# EAGLE board I2C-DS Brd v33 (EAGLE 9.7.0)
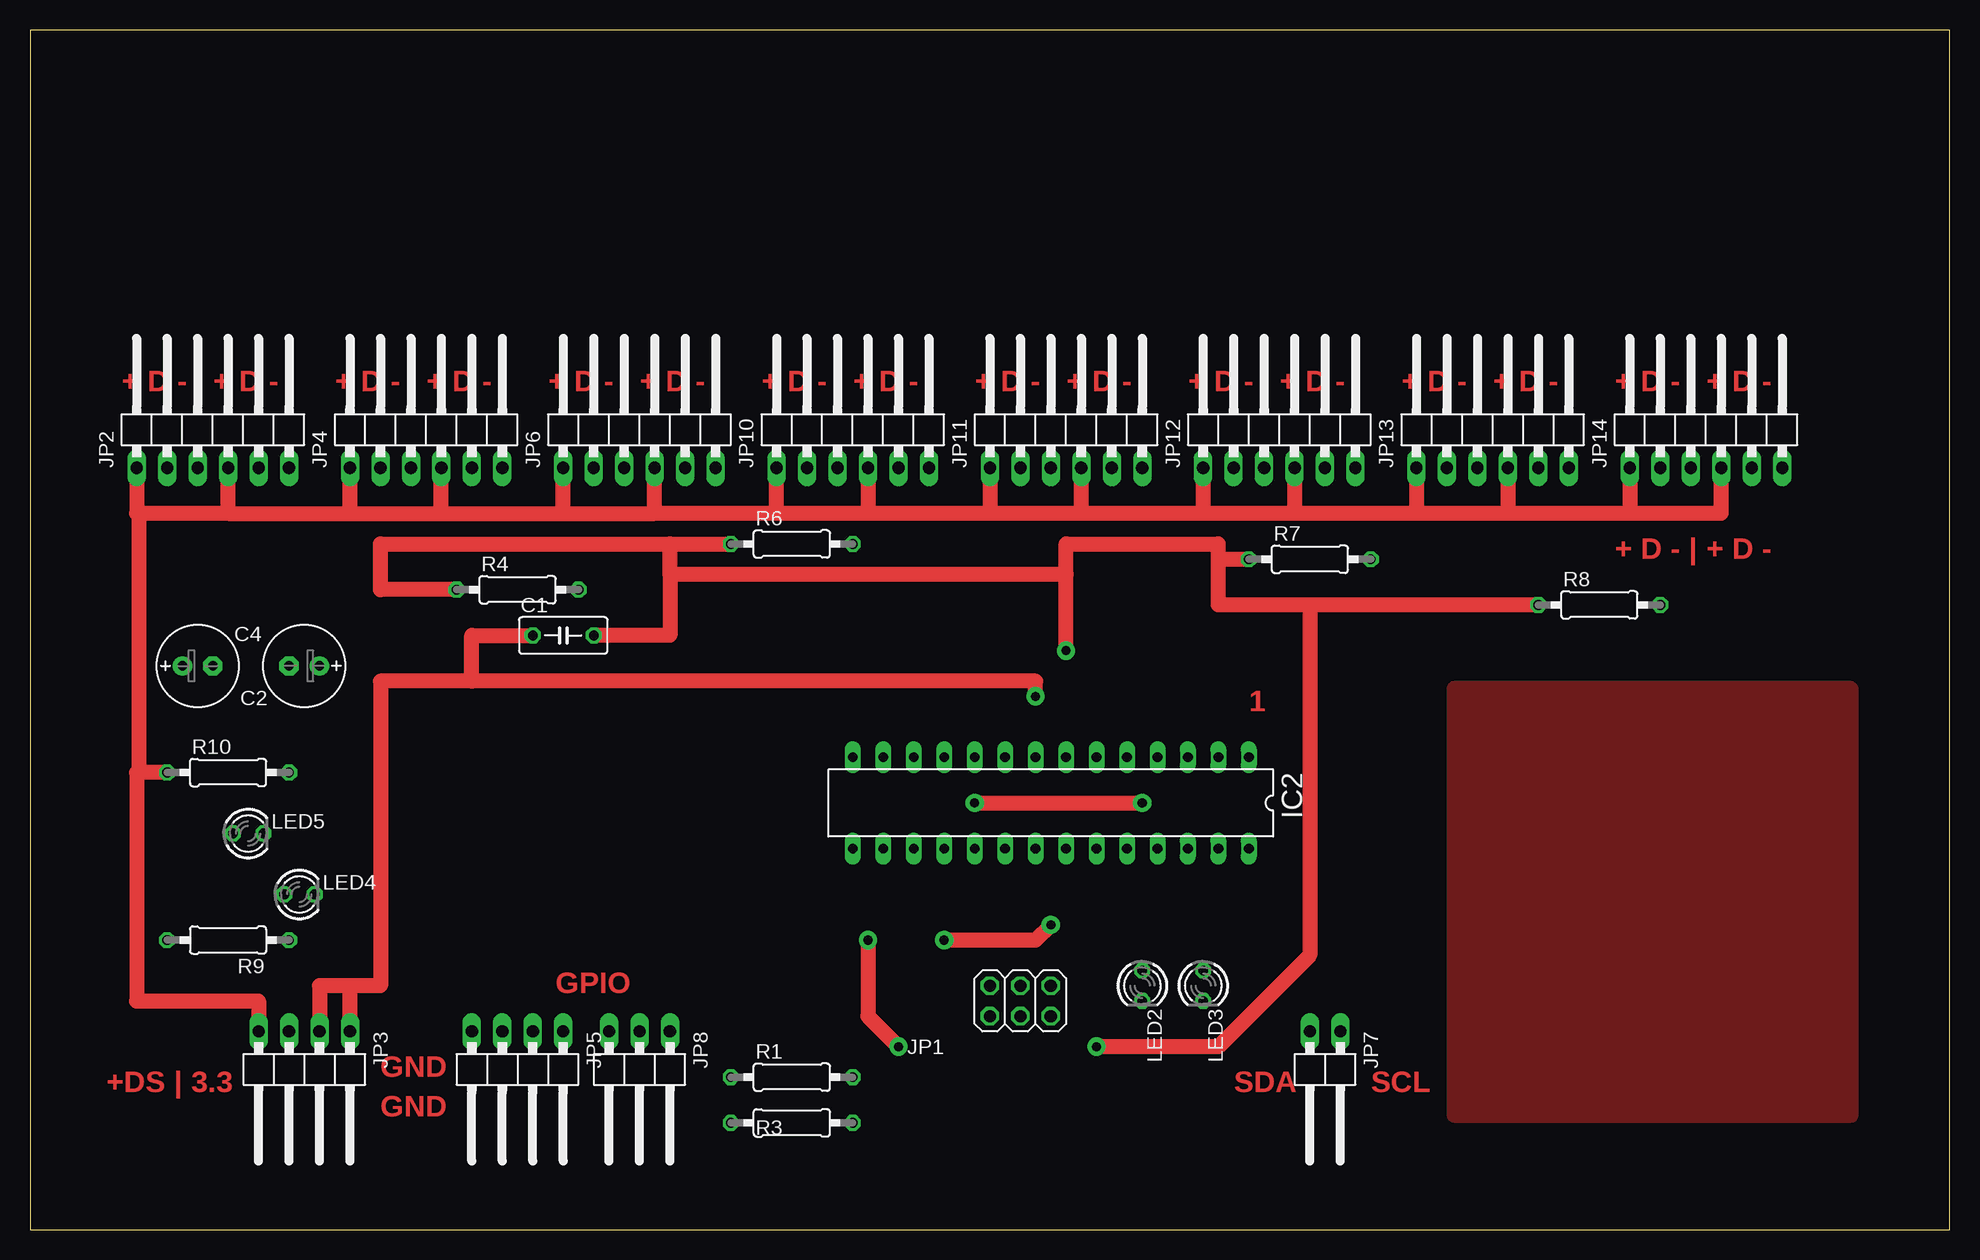
[diagram p0: board, top side]
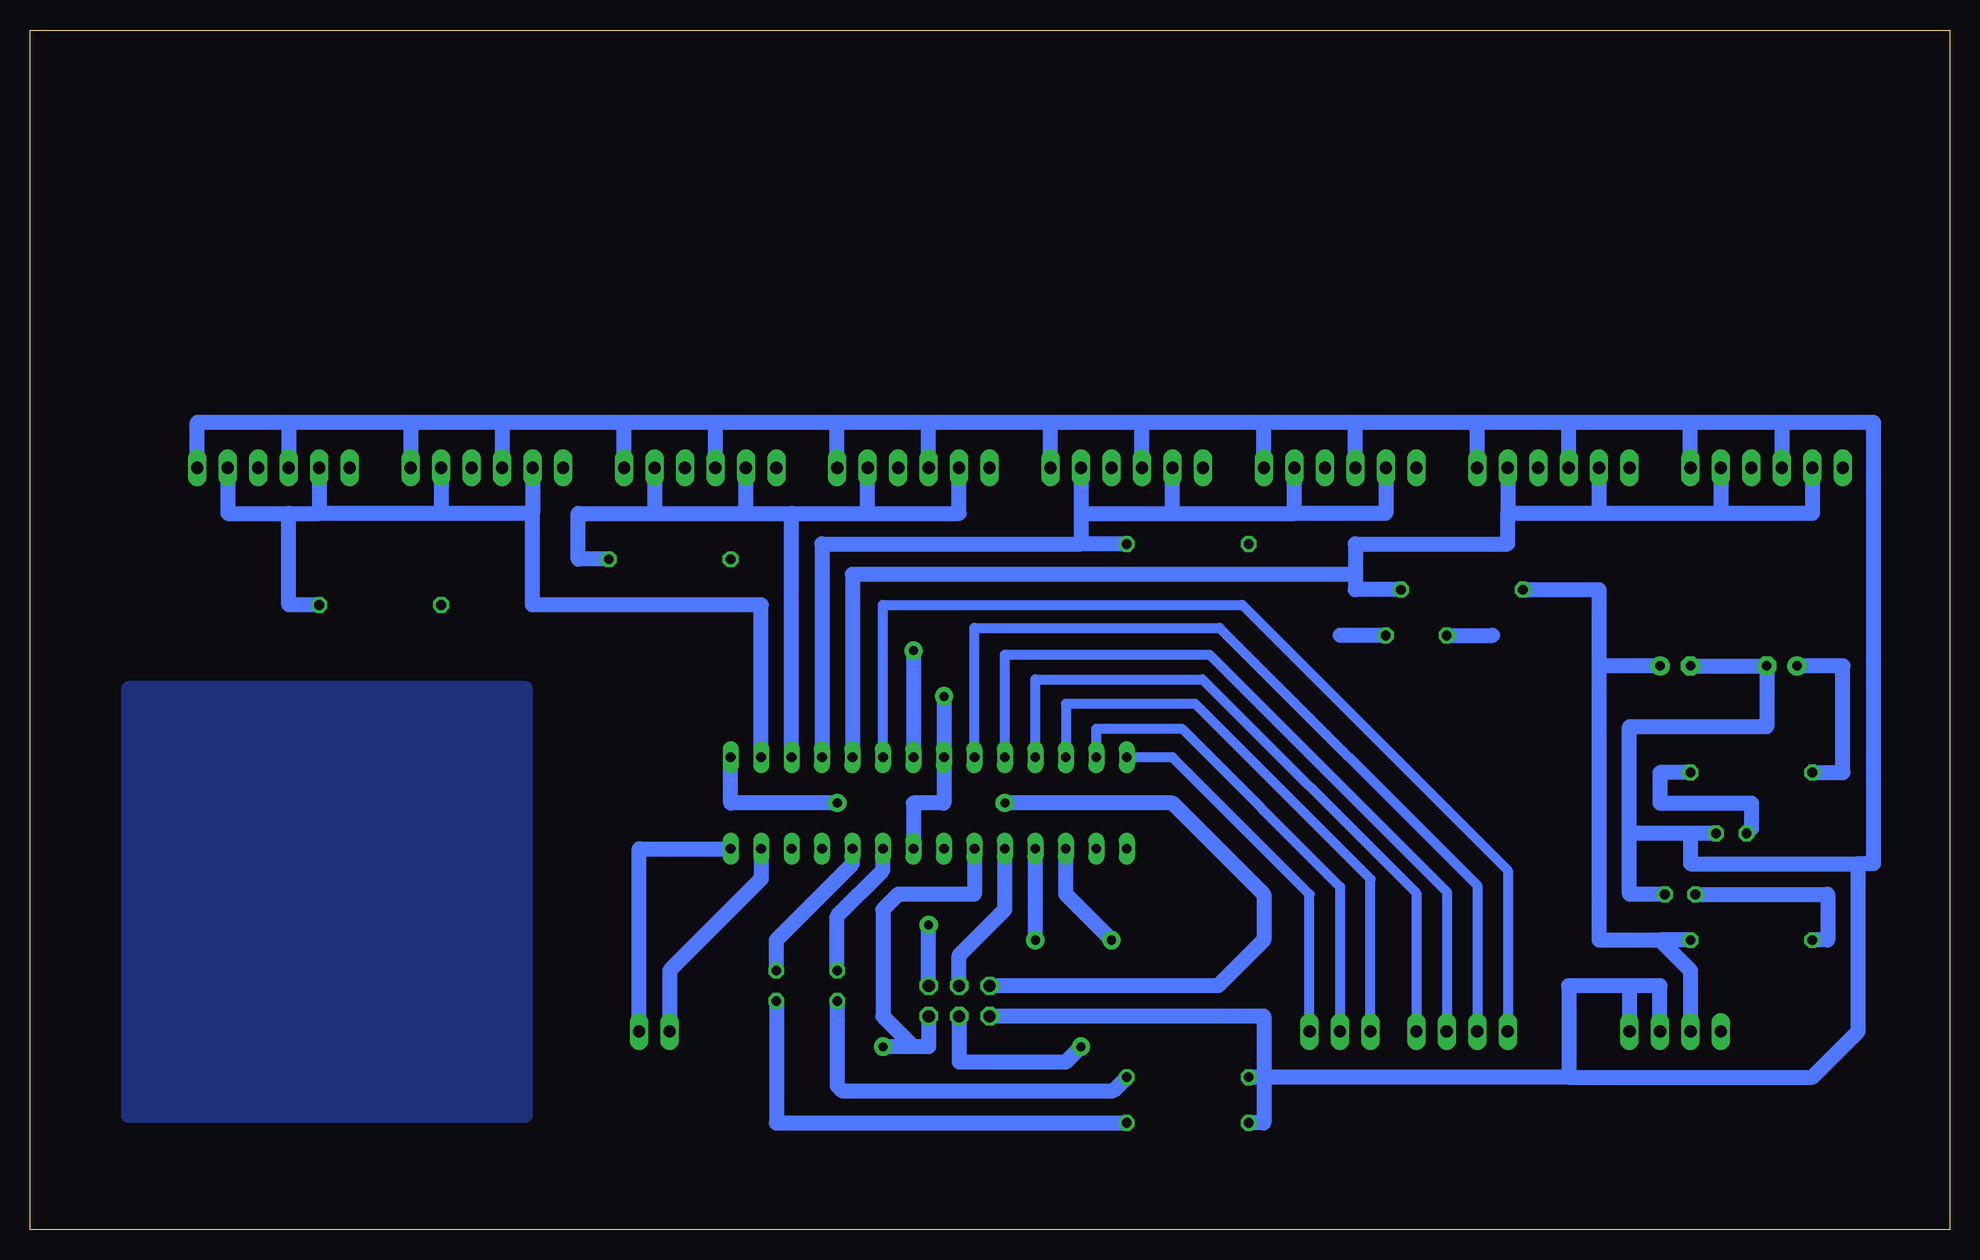
[diagram p1: board, bottom side, seen from below]

Size 160 x 100 mm. Coordinates in mm from the lower left corner, seen from the top.
Outline: 0,0 160,0 160,100 0,100 0,0
Copper layers (1*16): Top / Bottom
Stack-up Default Layer Stack: Top User Defined 0.035mm / Dielectric-1 User Defined 1.5mm / Bottom User Defined 0.035mm
Design rules: minimum copper width 6mil, minimum drill size 0.35mm, copper clearance wire_polygon to wire_polygon 6mil, copper clearance wire_polygon to pad_smd 6mil, copper clearance wire_polygon to via 6mil, copper clearance pad_smd to pad_smd 6mil, copper clearance pad_smd to via 6mil, copper clearance via to via 6mil, copper clearance smd to pad (same net) 6mil, copper clearance smd to via (same net) 6mil, copper clearance smd to smd (same net) 6mil, dimension clearance 40mil, restrict clearance 0mil, drill distance 6mil, keepout clearance 0mil

## Footprints (pad centres in the part's own frame; a part is rotated, then mirrored left to right if it is on the bottom)
C050-030X075 = drill 0.813 octagon: 1 -2.54,0; 2 2.54,0
E2,5-7 = drill 0.813 pad 1.6: + -1.27,0 | drill 0.813 pad 1.6 octagon: - 1.27,0
DIL28-3 = drill 0.813 long: 1 -16.51,-3.81; 2 -13.97,-3.81; 3 -11.43,-3.81; 4 -8.89,-3.81; 5 -6.35,-3.81; 6 -3.81,-3.81; 7 -1.27,-3.81; 8 1.27,-3.81; 9 3.81,-3.81; 10 6.35,-3.81; 11 8.89,-3.81; 12 11.43,-3.81; 13 13.97,-3.81; 14 16.51,-3.81; 15 16.51,3.81; 16 13.97,3.81; 17 11.43,3.81; 18 8.89,3.81; 19 6.35,3.81; 20 3.81,3.81; 21 1.27,3.81; 22 -1.27,3.81; 23 -3.81,3.81; 24 -6.35,3.81; 25 -8.89,3.81; 26 -11.43,3.81; 27 -13.97,3.81; 28 -16.51,3.81
2X03 = drill 1.016 octagon: 1 -2.54,-1.27; 2 -2.54,1.27; 3 0,-1.27; 4 0,1.27; 5 2.54,-1.27; 6 2.54,1.27
1X06/90 = drill 1.016 long: 1 -6.35,-3.81; 2 -3.81,-3.81; 3 -1.27,-3.81; 4 1.27,-3.81; 5 3.81,-3.81; 6 6.35,-3.81
1X04/90 = drill 1.016 long: 1 -3.81,-3.81; 2 -1.27,-3.81; 3 1.27,-3.81; 4 3.81,-3.81
1X02/90 = drill 1.016 long: 1 -1.27,-3.81; 2 1.27,-3.81
1X03/90 = drill 1.016 long: 1 -2.54,-3.81; 2 0,-3.81; 3 2.54,-3.81
LED3MM = drill 0.813 octagon: A -1.27,0; K 1.27,0
0207/10 = drill 0.813 octagon: 1 -5.08,0; 2 5.08,0

## Placement (x,y rotation side)
C1  100n  [C050-030X075]  44.45,49.53 0 top
C2  10u  [E2,5-7]  22.86,46.99 180 top
C4  10u  [E2,5-7]  13.97,46.99 0 top
IC2  MEGA8-P  [DIL28-3]  85.09,35.56 180 top
JP1  PINHD-2X3  [2X03]  82.55,19.05 180 top
JP2  PINHD-1X6/90  [1X06/90]  15.24,67.31 0 top
JP3  [1X04/90]  22.86,12.7 180 top
JP4  PINHD-1X6/90  [1X06/90]  33.02,67.31 0 top
JP5  [1X04/90]  40.64,12.7 180 top
JP6  PINHD-1X6/90  [1X06/90]  50.8,67.31 0 top
JP7  PINHD-1X2/90  [1X02/90]  107.95,12.7 180 top
JP8  PINHD-1X3/90  [1X03/90]  50.8,12.7 180 top
JP10  PINHD-1X6/90  [1X06/90]  68.58,67.31 0 top
JP11  PINHD-1X6/90  [1X06/90]  86.36,67.31 0 top
JP12  PINHD-1X6/90  [1X06/90]  104.14,67.31 0 top
JP13  PINHD-1X6/90  [1X06/90]  121.92,67.31 0 top
JP14  PINHD-1X6/90  [1X06/90]  139.7,67.31 0 top
LED2  TLLG4400  [LED3MM]  92.71,20.32 270 top
LED3  TLLG4400  [LED3MM]  97.79,20.32 270 top
LED4  [LED3MM]  22.45,27.94 0 top
LED5  [LED3MM]  18.19,33.02 0 top
R1  [0207/10]  63.5,12.7 0 top
R3  [0207/10]  63.5,8.89 0 top
R4  [0207/10]  40.64,53.34 0 top
R6  [0207/10]  63.5,57.15 0 top
R7  [0207/10]  106.68,55.88 0 top
R8  [0207/10]  130.81,52.07 0 top
R9  [0207/10]  16.51,24.13 180 top
R10  [0207/10]  16.51,38.1 0 top

## Library data of the parts
C1 C2 C4 = rcl; SPICEPREFIX: C
IC2 = atmel; OC_FARNELL: unknown; OC_NEWARK: unknown
JP1 JP2 JP4 JP6-JP8 JP10-JP14 = Connector; CATEGORY: CONNECTOR; SUB-CATEGORY: PIN-HEADER
JP3 JP5 = pinhead
LED2 LED3 = led; MF: VISHAY SEMICONDUCTOR; OC_FARNELL: 1612435
LED4 LED5 = led
R1 R3 R4 R6-R10 = rcl; SPICEPREFIX: R

## Nets
+3V3: C1.2 C2.+ IC2.7 IC2.20 JP1.2 JP3.3 R4.1 R6.1 R7.1 R8.1 R9.1
+5V: C4.+ JP2.1 JP2.4 JP3.4 JP4.1 JP4.4 JP6.1 JP6.4 JP10.1 JP10.4 JP11.1 JP11.4 JP12.1 JP12.4 JP13.1 JP13.4 JP14.1 JP14.4 R10.1
GND: C1.1 C2.- C4.- IC2.8 IC2.22 JP1.6 JP2.3 JP2.6 JP3.1 JP3.2 JP4.3 JP4.6 JP6.3 JP6.6 JP10.3 JP10.6 JP11.3 JP11.6 JP12.3 JP12.6 JP13.3 JP13.6 JP14.3 JP14.6 LED4.K LED5.K R1.1 R3.1
N$1: IC2.23 LED2.A
N$2: LED2.K R1.2
N$3: LED3.K R3.2
N$4: IC2.3 JP11.2 JP11.5 JP12.2 JP12.5 R7.2
N$5: IC2.2 JP13.2 JP13.5 JP14.2 JP14.5 R8.2
N$6: LED5.A R10.2
N$7: IC2.13 JP8.2
N$8: IC2.1 JP1.5
N$9: IC2.19 JP1.3
N$10: IC2.18 JP1.1
N$11: IC2.17 JP1.4
N$12: IC2.6 JP5.4
N$13: IC2.11 JP5.1
N$14: IC2.9 JP5.3
N$15: IC2.10 JP5.2
N$16: IC2.27 JP7.2
N$17: IC2.28 JP7.1
N$18: IC2.16
N$19: IC2.24 LED3.A
N$20: IC2.12 JP8.3
N$21: IC2.14 JP8.1
N$25: LED4.A R9.2
N$31: IC2.5 JP2.2 JP2.5 JP4.2 JP4.5 R4.2
N$34: IC2.4 JP6.2 JP6.5 JP10.2 JP10.5 R6.2

## Tracks (layer width: path | path; a pad name or v marks a point on that pad's centre or on a via)
123
  pour Bottom: 118.11,45.72 118.11,8.89 152.4,8.89 152.4,45.72
1234
  pour Top: 118.11,45.72 118.11,8.89 152.4,8.89 152.4,45.72
+3V3  (via drill 0.76 pad 1.52)
  Top 1.27: R4.1 29.21,53.34 29.21,57.15 53.34,57.15 | 99.06,55.88 R7.1 | R8.1 106.68,52.07 | v86.36,48.26 86.36,54.61 | 86.36,54.61 86.36,57.15 99.06,57.15 99.06,55.88 | 106.68,52.07 106.68,22.86 99.06,15.24 v88.9,15.24 | 106.68,52.07 99.06,52.07 99.06,55.88 | 86.36,54.61 53.34,54.61 | 53.34,54.61 53.34,57.15 | 53.34,57.15 R6.1 | C1.2 53.34,49.53 53.34,54.61
  Bottom 1.27: R9.1 24.13,24.13 | 24.13,24.13 29.21,24.13 29.21,46.99 | JP3.3 21.59,21.59 24.13,24.13 | R4.1 29.21,53.34 29.21,46.99 | C1.2 50.8,49.53 | v86.36,48.26 IC2.7 | IC2.20 81.28,27.94 87.63,27.94 88.9,26.67 88.9,17.78 86.36,15.24 | JP1.2 85.09,15.24 86.36,15.24 | 86.36,15.24 v88.9,15.24 | C2.+ 29.21,46.99
+5V
  Top 1.27: 16.51,59.69 26.67,59.69 | 26.67,59.69 34.29,59.69 | 34.29,59.69 44.45,59.69 | 44.45,59.69 52.07,59.69 | 62.23,59.69 52.07,59.69 | 80.01,59.69 69.85,59.69 | 87.63,59.69 80.01,59.69 | 115.57,59.69 105.41,59.69 | 105.41,59.69 97.79,59.69 | 133.35,59.69 123.19,59.69 | 123.19,59.69 115.57,59.69 | 133.35,59.69 140.97,59.69 JP14.4 | JP3.4 19.05,19.05 8.89,19.05 8.89,38.1 9.07,38.1 | 9.07,59.69 9.07,38.1 | R10.1 9.07,38.1 | 97.79,59.69 87.63,59.69 | 16.51,59.69 9.07,59.69 | 9.07,59.69 8.89,59.69 JP2.1 | JP14.1 133.35,59.69 | JP13.1 115.57,59.69 | JP13.4 123.19,59.69 | JP12.4 105.41,59.69 | JP12.1 97.79,59.69 | 87.63,59.69 JP11.4 | JP11.1 80.01,59.69 | JP10.4 69.85,59.69 | 62.23,59.69 JP10.1 | 52.07,59.69 JP6.4 | 44.45,59.69 JP6.1 | 34.29,59.69 JP4.4 | 26.67,59.69 JP4.1 | 16.51,59.69 JP2.4 | 69.85,59.69 62.23,59.69
  Bottom 1.27: R10.1 8.89,38.1 8.89,46.99 C4.+
GND  (via drill 0.76 pad 1.52)
  Top 1.27: JP3.1 26.67,20.32 | 26.67,20.32 24.13,20.32 JP3.2 | 36.83,45.72 83.82,45.72 v83.82,44.45 | 36.83,45.72 29.21,45.72 29.21,20.32 26.67,20.32 | 36.83,45.72 36.83,49.53 C1.1
  Bottom 1.27: 26.67,20.32 JP3.1 | 26.67,20.32 24.13,20.32 JP3.2 | LED5.K 21.59,33.02 | 21.59,33.02 26.67,33.02 | LED4.K 26.67,27.94 26.67,33.02 | JP1.6 57.15,17.78 57.15,12.7 | 57.15,12.7 R1.1 | 57.15,12.7 57.15,8.89 R3.1 | C1.1 38.1,49.53 | v83.82,44.45 IC2.8 83.82,35.56 86.36,35.56 IC2.22 | JP14.6 146.05,67.31 138.43,67.31 | 138.43,67.31 JP14.3 | 138.43,67.31 128.27,67.31 | 128.27,67.31 JP13.6 | 128.27,67.31 120.65,67.31 | 120.65,67.31 JP13.3 | 120.65,67.31 110.49,67.31 | JP12.6 110.49,67.31 | 110.49,67.31 102.87,67.31 | 102.87,67.31 92.71,67.31 | 92.71,67.31 85.09,67.31 | 85.09,67.31 74.93,67.31 | 74.93,67.31 67.31,67.31 | 67.31,67.31 57.15,67.31 | 57.15,67.31 49.53,67.31 | 49.53,67.31 39.37,67.31 | 39.37,67.31 31.75,67.31 | 31.75,67.31 21.59,67.31 | 21.59,67.31 13.97,67.31 | 13.97,67.31 JP2.3 | JP2.6 21.59,67.31 | JP4.3 31.75,67.31 | JP4.6 39.37,67.31 | JP6.3 49.53,67.31 | JP6.6 57.15,67.31 | JP10.6 74.93,67.31 | JP10.3 67.31,67.31 | JP11.6 92.71,67.31 | JP11.3 85.09,67.31 | JP12.3 102.87,67.31 | 31.75,12.7 11.43,12.7 7.62,16.51 7.62,30.48 | 13.97,67.31 6.35,67.31 6.35,30.48 7.62,30.48 | 26.67,33.02 26.67,41.91 15.24,41.91 C4.- C2.- | 31.75,12.7 57.15,12.7 | 21.59,33.02 21.59,30.48 7.62,30.48 | 26.67,20.32 31.75,20.32 31.75,12.7
N$1
  Bottom 1.27: IC2.23 88.9,29.95 92.71,26.14 LED2.A
N$2
  Bottom 1.27: R1.2 69.7,11.58 92.33,11.58 92.71,11.96 LED2.K
N$3
  Bottom 1.27: LED3.K 97.79,8.89 R3.2
N$4
  Bottom 1.27: JP12.5 107.95,59.69 | 107.95,59.69 100.33,59.69 | 100.33,59.69 JP12.2 | 100.33,59.69 96.52,59.69 | 96.52,59.69 90.17,59.69 | 90.17,59.69 JP11.5 | 90.17,59.69 82.55,59.69 JP11.2 | R7.2 114.3,55.88 114.3,59.69 107.95,59.69 | IC2.3 96.52,59.69
N$5
  Bottom 1.27: JP14.5 143.51,59.69 138.43,59.69 | 138.43,59.69 135.89,59.69 | JP14.2 135.89,59.69 | JP13.5 125.73,59.69 | 125.73,59.69 135.89,59.69 | JP13.2 118.11,59.69 | 118.11,59.69 125.73,59.69 | R8.2 138.43,52.07 138.43,59.69 | 118.11,59.69 118.11,52.07 99.06,52.07 IC2.2
N$6
  Bottom 1.27: R10.2 24.13,38.1 24.13,35.56 16.51,35.56 16.51,33.43 LED5.A
N$7
  Bottom 0.813: JP8.2 50.8,28.57 63.98,41.76 71.12,41.76 IC2.13
N$8  (via drill 0.76 pad 1.52)
  Top 1.27: v78.74,35.56 v92.71,35.56
  Bottom 1.27: JP1.5 60.96,20.32 57.15,24.13 57.15,27.94 64.77,35.56 v78.74,35.56 | IC2.1 101.6,35.56 v92.71,35.56
N$9
  Bottom 1.27: JP1.3 82.55,22.86 78.74,26.67 IC2.19
N$10  (via drill 0.76 pad 1.52)
  Top 1.27: v85.09,25.4 83.82,24.13 v76.2,24.13
  Bottom 1.27: JP1.1 v85.09,25.4 | v76.2,24.13 IC2.18
N$11  (via drill 0.76 pad 1.52)
  Top 1.27: v69.85,24.13 69.85,17.78 v72.39,15.24
  Bottom 1.27: v69.85,24.13 73.66,27.94 IC2.17 | JP1.4 82.55,13.97 73.66,13.97 v72.39,15.24
N$12
  Bottom 0.813: IC2.6 88.9,52.07 58.95,52.07 36.83,29.95 JP5.4
N$13
  Bottom 0.813: JP5.1 44.45,28.05 62.28,45.87 76.2,45.87 IC2.11
N$14
  Bottom 0.813: IC2.9 81.28,50.16 60.85,50.16 39.37,28.68 JP5.3
N$15
  Bottom 0.813: JP5.2 41.91,28.15 61.69,47.93 78.74,47.93 IC2.10
N$16
  Bottom 1.27: JP7.2 106.68,21.59 99.06,29.21 IC2.27
N$17
  Bottom 1.27: JP7.1 109.22,31.75 IC2.28
N$19
  Bottom 1.27: LED3.A 97.79,24.13 91.44,30.48 IC2.24
N$20
  Bottom 0.813: JP8.3 48.26,29.21 62.87,43.81 73.66,43.81 IC2.12
N$21
  Bottom 0.813: JP8.1 53.34,27.94 64.77,39.37 IC2.14
N$25
  Bottom 1.27: LED4.A 10.16,27.94 10.16,24.13 R9.2
N$31
  Bottom 1.27: JP4.5 36.83,59.69 | JP4.2 29.21,59.69 | 29.21,59.69 36.83,59.69 | JP2.5 19.05,59.69 | 19.05,59.69 29.21,59.69 | JP2.2 11.43,59.69 19.05,59.69 | 36.83,59.69 36.83,57.15 49.53,57.15 49.53,54.61 | R4.2 49.53,53.34 49.53,54.61 | 49.53,54.61 91.44,54.61 IC2.5
N$34
  Bottom 1.27: JP10.5 72.39,59.69 | 64.77,59.69 JP10.2 | 64.77,59.69 54.61,59.69 | 54.61,59.69 JP6.5 | JP6.2 46.99,59.69 54.61,59.69 | 72.39,59.69 72.39,57.15 | 72.39,57.15 93.98,57.15 IC2.4 | 72.39,59.69 64.77,59.69 | R6.2 72.39,57.15

## Text on the board
Top: + D - | + D - | + D - | + D - | + D - | + D - | + D - | + D - | + D - | + D - | + D - | + D - | + D - | + D - | + D - | + D - | + D - | + D - | 1 | GPIO | GND | +DS | 3.3 | SDA | SCL | GND